# EAGLE board CT_schematic (EAGLE 7.6.0)

Size 100 x 80 mm. Coordinates in mm from the lower left corner, seen from the top.
Outline: 0,0 100,0 100,80 0,80 0,0
Copper layers (1*16): Top 0.035mm / dielectric 1.5mm / Bottom 0.035mm
Design rules "default": minimum track width 10mil, minimum drill 24mil, track to track 8mil, track to pad 8mil, pad to pad 8mil, via to via 8mil, smd to smd 8mil, copper to edge 40mil, drill to drill 8mil, minimum pad ring 10mil, minimum via ring 8mil, stop-mask expansion 4mil, vias tented up to drill 0mil, thermal gap 10mil

## Footprints (pad centres in the part's own frame; a part is rotated, then mirrored left to right if it is on the bottom)
C0603 = smd 0.8 x 0.8: 1 -0.762,0; 2 0.762,0
C0402 = smd 0.5 x 0.5: 1 -0.508,0; 2 0.508,0
C1206 = smd 1.3 x 1.6: 1 -1.524,0; 2 1.524,0
C1210 = smd 1.2 x 2.5: 1 -1.524,0; 2 1.524,0
EXV-9H = smd 3.505 x 1.676: 1 -2.857,0; 2 2.857,0
L0603 = smd 0.8 x 0.8: 1 -0.762,0; 2 0.762,0
PJ-037B_PACKAGE = drill 3.7 square: 1 12,0 | drill 3.2 square: 2 6,0
R0603 = smd 0.8 x 0.8: 1 -0.762,0; 2 0.762,0
LQFP48 = smd 0.3 x 1.2: 1 -2.75,-4.25; 2 -2.25,-4.25; 3 -1.75,-4.25; 4 -1.25,-4.25; 5 -0.75,-4.25; 6 -0.25,-4.25; 7 0.25,-4.25; 8 0.75,-4.25; 9 1.25,-4.25; 10 1.75,-4.25; 11 2.25,-4.25; 12 2.75,-4.25; 25 2.75,4.25; 26 2.25,4.25; 27 1.75,4.25; 28 1.25,4.25; 29 0.75,4.25; 30 0.25,4.25; 31 -0.25,4.25; 32 -0.75,4.25; 33 -1.25,4.25; 34 -1.75,4.25; 35 -2.25,4.25; 36 -2.75,4.25 | smd 1.2 x 0.3: 13 4.25,-2.75; 14 4.25,-2.25; 15 4.25,-1.75; 16 4.25,-1.25; 17 4.25,-0.75; 18 4.25,-0.25; 19 4.25,0.25; 20 4.25,0.75; 21 4.25,1.25; 22 4.25,1.75; 23 4.25,2.25; 24 4.25,2.75; 37 -4.25,2.75; 38 -4.25,2.25; 39 -4.25,1.75; 40 -4.25,1.25; 41 -4.25,0.75; 42 -4.25,0.25; 43 -4.25,-0.25; 44 -4.25,-0.75; 45 -4.25,-1.25; 46 -4.25,-1.75; 47 -4.25,-2.25; 48 -4.25,-2.75
SOIC-8 = smd 1.6 x 0.6: 1 -2.7,1.905 | smd 1.55 x 0.6: 2 -2.7,0.635; 3 -2.7,-0.635; 4 -2.7,-1.905; 5 2.7,-1.905; 6 2.7,-0.635; 7 2.7,0.635; 8 2.7,1.905
SAMTEC_FTSH-105-01-L-DV-K = smd 0.762 x 2.794: 1 -2.54,-2.032; 2 -2.54,2.032; 3 -1.27,-2.032; 4 -1.27,2.032; 5 0,-2.032; 6 0,2.032; 7 1.27,-2.032; 8 1.27,2.032; 9 2.54,-2.032; 10 2.54,2.032
DFN-10 = smd 0.965 x 0.305: 1 -1.321,1; 2 -1.321,0.5; 3 -1.321,0; 4 -1.321,-0.5; 5 -1.321,-1; 6 1.321,-1; 7 1.321,-0.5; 8 1.321,0; 9 1.321,0.5; 10 1.321,1
SSOP-28 = smd 1.5 x 0.4: 1 -3.625,4.225; 2 -3.625,3.575; 3 -3.625,2.925; 4 -3.625,2.275; 5 -3.625,1.625; 6 -3.625,0.975; 7 -3.625,0.325; 8 -3.625,-0.325; 9 -3.625,-0.975; 10 -3.625,-1.625; 11 -3.625,-2.275; 12 -3.625,-2.925; 13 -3.625,-3.575; 14 -3.625,-4.225; 15 3.625,-4.225; 16 3.625,-3.575; 17 3.625,-2.925; 18 3.625,-2.275; 19 3.625,-1.625; 20 3.625,-0.975; 21 3.625,-0.325; 22 3.625,0.325; 23 3.625,0.975; 24 3.625,1.625; 25 3.625,2.275; 26 3.625,2.925; 27 3.625,3.575; 28 3.625,4.225
182-009-MALE = drill 1.194 pad 1.524 octagon: 1 -5.537,10.923; 2 -2.769,10.923; 3 0,10.923; 4 2.769,10.923; 5 5.537,10.923; 6 -4.153,8.08; 7 -1.384,8.08; 8 1.384,8.08; 9 4.153,8.08 | hole 3.048: -12.446,9.501; 12.446,9.501
ABLS-25.000MHZ-B2F-T = smd 5.6 x 2.8: 1 -3.81,0; 2 5.69,0
ASEK = smd 1.4 x 1: 1 -1.1,-0.8; 2 1.1,-0.8; 3 1.1,0.8; 4 -1.1,0.8
WSON-8 = smd 0.3 x 0.6: 1 -0.75,0; 2 0.05,0; 3 0.85,0; 4 1.65,0; 5 1.65,3.8; 6 0.85,3.8; 7 0.05,3.8; 8 -0.75,3.8 | smd 3 x 2.6: PAD 0.45,1.9
SON-6 = smd 0.55 x 0.3: 1 -0.355,0.5 | smd 0.52 x 0.3: 2 -0.37,0; 3 -0.37,-0.5; 4 0.37,-0.5; 5 0.37,0; 6 0.37,0.5
SW_4-1437565-2 = smd 1.4 x 2.1: 1 -2.23,4.55; 2 -2.23,-4.55; 3 2.23,4.55; 4 2.23,-4.55
LGM67K-G1J2-24-Z = smd 0.8 x 1.4: A -2,0; C 0,0
NC7SZ125M5X = smd 1.3 x 0.7: 1 -1.3,0.95; 2 -1.3,0; 3 -1.3,-0.95; 4 1.3,-0.95; 5 1.3,0.95

## Placement (x,y rotation side)
C1  1e-06  [C0603]  -68.58,66.04 0 top  (outside the outline)
C2  1e-07  [C0603]  -72.39,66.04 0 top  (outside the outline)
C3  1e-07  [C0603]  -15.24,71.12 0 top  (outside the outline)
C4  1e-07  [C0603]  -19.05,71.12 0 top  (outside the outline)
C5  1e-07  [C0603]  -22.86,71.12 0 top  (outside the outline)
C6  1e-07  [C0603]  -26.67,71.12 0 top  (outside the outline)
C7  4.7e-06  [C0603]  -64.77,66.04 0 top  (outside the outline)
C8  1e-08  [C0603]  -30.48,71.12 0 top  (outside the outline)
C9  1e-06  [C0603]  -34.29,71.12 0 top  (outside the outline)
C10  1e-11  [C0402]  -26.67,76.2 0 top  (outside the outline)
C11  1e-11  [C0402]  -30.48,76.2 0 top  (outside the outline)
C12  1e-08  [C0402]  -34.29,76.2 0 top  (outside the outline)
C13  1e-07  [C0402]  -38.1,76.2 0 top  (outside the outline)
C14  1e-07  [C0402]  -41.91,76.2 0 top  (outside the outline)
C15  1e-07  [C0402]  -45.72,76.2 0 top  (outside the outline)
C16  1e-06  [C0603]  -38.1,71.12 0 top  (outside the outline)
C17  1e-07  [C0402]  -49.53,76.2 0 top  (outside the outline)
C18  1e-07  [C0402]  -53.34,76.2 0 top  (outside the outline)
C19  1e-07  [C0402]  -57.15,76.2 0 top  (outside the outline)
C20  1e-07  [C0402]  -60.96,76.2 0 top  (outside the outline)
C21  1e-07  [C0402]  -64.77,76.2 0 top  (outside the outline)
C22  1e-07  [C0402]  -68.58,76.2 0 top  (outside the outline)
C23  1e-07  [C0402]  -72.39,76.2 0 top  (outside the outline)
C24  1e-08  [C0402]  -76.2,76.2 0 top  (outside the outline)
C25  1e-08  [C0402]  -15.24,81.28 0 top  (outside the outline)
C26  1e-05  [C1206]  -35.56,58.42 0 top  (outside the outline)
C27  1e-05  [C1210]  -29.21,59.69 0 top  (outside the outline)
C28  1e-07  [C0402]  -19.05,81.28 0 top  (outside the outline)
C29  0.0001  [EXV-9H]  -38.1,52.07 0 top  (outside the outline)
C30  0.0001  [EXV-9H]  -49.53,52.07 0 top  (outside the outline)
C31  1e-08  [C0402]  -22.86,81.28 0 top  (outside the outline)
C32  1e-08  [C0402]  -26.67,81.28 0 top  (outside the outline)
F1  240.0  [L0603]  -41.91,71.12 0 top  (outside the outline)
J1  PJ-037B  [PJ-037B_PACKAGE]  -57.15,29.21 0 top  (outside the outline)
R1  10000.0  [R0603]  -73.66,58.42 0 top  (outside the outline)
R2  1000.0  [R0603]  -45.72,71.12 0 top  (outside the outline)
R3  1600.5  [R0603]  -49.53,71.12 0 top  (outside the outline)
R4  4700.0  [R0603]  -53.34,71.12 0 top  (outside the outline)
R5  2200.0  [R0603]  -57.15,71.12 0 top  (outside the outline)
R6  2200.0  [R0603]  -60.96,71.12 0 top  (outside the outline)
R7  10000.0  [R0603]  -15.24,66.04 0 top  (outside the outline)
R8  10000.0  [R0603]  -20.32,66.04 0 top  (outside the outline)
R9  10000.0  [R0603]  -25.4,66.04 0 top  (outside the outline)
R10  10000.0  [R0603]  -30.48,66.04 0 top  (outside the outline)
R11  10000.0  [R0603]  -35.56,66.04 0 top  (outside the outline)
R12  10000.0  [R0603]  -40.64,66.04 0 top  (outside the outline)
R13  10000.0  [R0603]  -45.72,66.04 0 top  (outside the outline)
R14  10000.0  [R0603]  -50.8,66.04 0 top  (outside the outline)
R15  5.0  [R0603]  -64.77,71.12 0 top  (outside the outline)
R16  100000.0  [R0603]  -53.34,58.42 0 top  (outside the outline)
R17  100000.0  [R0603]  -58.42,58.42 0 top  (outside the outline)
R18  2231.0  [R0603]  -68.58,71.12 0 top  (outside the outline)
R19  1000.0  [R0603]  -72.39,71.12 0 top  (outside the outline)
R20  10000.0  [R0603]  -55.88,66.04 0 top  (outside the outline)
R21  10000.0  [R0603]  -60.96,66.04 0 top  (outside the outline)
R22  9100.0  [R0603]  -15.24,76.2 0 top  (outside the outline)
R23  680000.0  [R0603]  -63.5,58.42 0 top  (outside the outline)
R24  120000.0  [R0603]  -68.58,58.42 0 top  (outside the outline)
U1  STM32F303C6T6  [LQFP48]  -24.13,43.18 0 top  (outside the outline)
U2  AT25640B-SSHL-T  [SOIC-8]  -40.64,41.91 0 top  (outside the outline)
U3  FTSH-105-01-L-DV-K  [SAMTEC_FTSH-105-01-L-DV-K]  -35.56,30.48 0 top  (outside the outline)
U4  MAG3110FCR1  [DFN-10]  -20.32,76.2 0 top  (outside the outline)
U5  ST3241EBPR  [SSOP-28]  -58.42,7.62 0 top  (outside the outline)
U6  182-009-113R531  [182-009-MALE]  -36.83,6.35 0 top  (outside the outline)
U7  ABLS-25.000MHZ-B2F-T  [ABLS-25.000MHZ-B2F-T]  -68.58,52.07 0 top  (outside the outline)
U8  ASEK-32.768KHz-ECST  [ASEK]  -29.21,52.07 0 top  (outside the outline)
U9  LP3878SDX-ADJ/NOPB  [WSON-8]  -62.23,40.64 0 top  (outside the outline)
U10  TPS3895ADRYR  [SON-6]  -29.21,80.01 0 top  (outside the outline)
U11  4-1437565-2  [SW_4-1437565-2]  -73.66,27.94 0 top  (outside the outline)
U12  Q65110A2395  [LGM67K-G1J2-24-Z]  -17.78,59.69 0 top  (outside the outline)
U13  nc7sz125m5x  [NC7SZ125M5X]  -40.64,58.42 0 top  (outside the outline)
U14  nc7sz125m5x  [NC7SZ125M5X]  -46.99,58.42 0 top  (outside the outline)

## Library data of the parts
C1-C32 F1 J1 R1-R24 U1-U14 = circuit_tree

## Nets
CLK_CRYSTAL_U1_5: C10.1 U1.5 U7.1
CLK_CRYSTAL_U1_6: C11.1 U1.6 U7.2
CLK_U1_3: U1.3 U8.3
GND: C1.2 C2.2 C3.2 C4.2 C5.2 C6.2 C7.2 C8.2 C9.2 C10.2 C11.2 C12.2 C13.2 C14.2 C15.2 C16.2 C17.2 C18.2 C19.2 C22.2 C23.2 C24.2 C25.2 C26.2 C27.2 C28.2 C29.2 C30.2 C31.2 C32.2 J1.2 R2.2 R7.2 R14.2 R15.2 R19.2 R22.2 R24.2 U1.8 U1.23 U1.35 U1.47 U2.4 U3.3 U3.5 U4.5 U4.10 U5.23 U5.25 U6.5 U8.2 U9.3 U9.PAD U10.2 U12.C U13.2 U13.3 U14.1 U14.3
NET_U1_7: R4.1 U1.7 U14.4
NET_U1_9: C8.1 C9.1 F1.1 U1.9
NET_U1_42: R5.1 U1.42 U4.7
NET_U1_43: R6.1 U1.43 U4.6
NET_U1_44: R7.1 U1.44
NET_U1_45: R3.1 U1.45 U12.A
NET_U1_46: R1.1 U1.46 U11.3 U11.4
NET_U2_3: R8.1 U2.3
NET_U2_7: R10.1 U2.7
NET_U3_9: R15.1 U3.9
NET_U4_1: C14.1 U4.1
NET_U4_4: C17.1 U4.4
NET_U5_1: C21.1 U5.1
NET_U5_2: C21.2 U5.2
NET_U5_3: C23.1 U5.3
NET_U5_22: R16.1 U5.22
NET_U5_24: C20.2 U5.24
NET_U5_27: C22.1 U5.27
NET_U5_28: C20.1 U5.28
NET_U6_2: U5.4 U6.2
NET_U6_3: U5.9 U6.3
NET_U6_7: U5.5 U6.7
NET_U6_8: U5.10 U6.8
NET_U9_1: C25.1 U9.1
NET_U9_6: R18.2 R19.1 U9.6
NET_U9_8: R17.1 U9.8
NET_U10_1: R21.1 R22.1 U10.1
NET_U10_3: R23.2 R24.1 U10.3
NET_U10_4: R20.1 U10.4 U13.4 U14.2
NET_U11_1: R2.1 U11.1 U11.2
PROC_SPI1_MISO: U1.16 U2.2
PROC_SPI1_MOSI: U1.17 U2.5
PROC_SPI1_NSS: R9.1 U1.14 U2.1
PROC_SPI1_SCK: U1.15 U2.6
PROC_SYS_JTCK_SWCLK: R14.1 U1.37 U3.4
PROC_SYS_JTDI: R12.1 U1.38 U3.8
PROC_SYS_JTDO_TRACESWO: U1.39 U3.6
PROC_SYS_JTMS_SWDIO: R13.1 U1.34 U3.2
PROC_USART1_CTS: U1.32 U5.13
PROC_USART1_RTS: U1.33 U5.18
PROC_USART1_RX: U1.31 U5.19
PROC_USART1_TX: U1.30 U5.14
RST_OUT_U3_JTAG_RST_B: R11.1 U3.10 U13.1
VCC_S1_6V6: C26.1 C29.1 C30.1 J1.1 R17.2 U9.4
VCC_TIER1_3V3: C1.1 C2.1 C3.1 C4.1 C5.1 C6.1 C7.1 C12.1 C13.1 C15.1 C16.1 C18.1 C19.1 C24.1 C27.1 C28.1 C31.1 C32.1 F1.2 R1.2 R3.2 R4.2 R5.2 R6.2 R8.2 R9.2 R10.2 R11.2 R12.2 R13.2 R16.2 R18.1 R20.2 R21.2 R23.1 U1.1 U1.24 U1.36 U1.48 U2.8 U3.1 U4.2 U4.8 U5.26 U8.4 U9.5 U10.6 U13.5 U14.5

## Tracks (layer width: path | path; a pad name or v marks a point on that pad's centre or on a via)
CLK_CRYSTAL_U1_5  (2 unrouted)
CLK_CRYSTAL_U1_6  (2 unrouted)
CLK_U1_3  (1 unrouted)
GND  (58 unrouted)
NET_U1_7  (2 unrouted)
NET_U1_9  (3 unrouted)
NET_U1_42  (2 unrouted)
NET_U1_43  (2 unrouted)
NET_U1_44  (1 unrouted)
NET_U1_45  (2 unrouted)
NET_U1_46  (3 unrouted)
NET_U2_3  (1 unrouted)
NET_U2_7  (1 unrouted)
NET_U3_9  (1 unrouted)
NET_U4_1  (1 unrouted)
NET_U4_4  (1 unrouted)
NET_U5_1  (1 unrouted)
NET_U5_2  (1 unrouted)
NET_U5_3  (1 unrouted)
NET_U5_22  (1 unrouted)
NET_U5_24  (1 unrouted)
NET_U5_27  (1 unrouted)
NET_U5_28  (1 unrouted)
NET_U6_2  (1 unrouted)
NET_U6_3  (1 unrouted)
NET_U6_7  (1 unrouted)
NET_U6_8  (1 unrouted)
NET_U9_1  (1 unrouted)
NET_U9_6  (2 unrouted)
NET_U9_8  (1 unrouted)
NET_U10_1  (2 unrouted)
NET_U10_3  (2 unrouted)
NET_U10_4  (3 unrouted)
NET_U11_1  (2 unrouted)
PROC_SPI1_MISO  (1 unrouted)
PROC_SPI1_MOSI  (1 unrouted)
PROC_SPI1_NSS  (2 unrouted)
PROC_SPI1_SCK  (1 unrouted)
PROC_SYS_JTCK_SWCLK  (2 unrouted)
PROC_SYS_JTDI  (2 unrouted)
PROC_SYS_JTDO_TRACESWO  (1 unrouted)
PROC_SYS_JTMS_SWDIO  (2 unrouted)
PROC_USART1_CTS  (1 unrouted)
PROC_USART1_RTS  (1 unrouted)
PROC_USART1_RX  (1 unrouted)
PROC_USART1_TX  (1 unrouted)
RST_OUT_U3_JTAG_RST_B  (2 unrouted)
VCC_S1_6V6  (5 unrouted)
VCC_TIER1_3V3  (48 unrouted)